# Altium PCB Fri3d_2026_Keeb_00.PcbDoc (part 1 of 2)
Units mm, origin at the board's own origin, x right, y up, seen from the top; angles counter-clockwise.
Board outline 99 x 106 mm, 2 copper layers (Top Layer, Bottom Layer), stack 1.571 mm thick; 46 components, 52 nets, 333 pads, 191 vias.
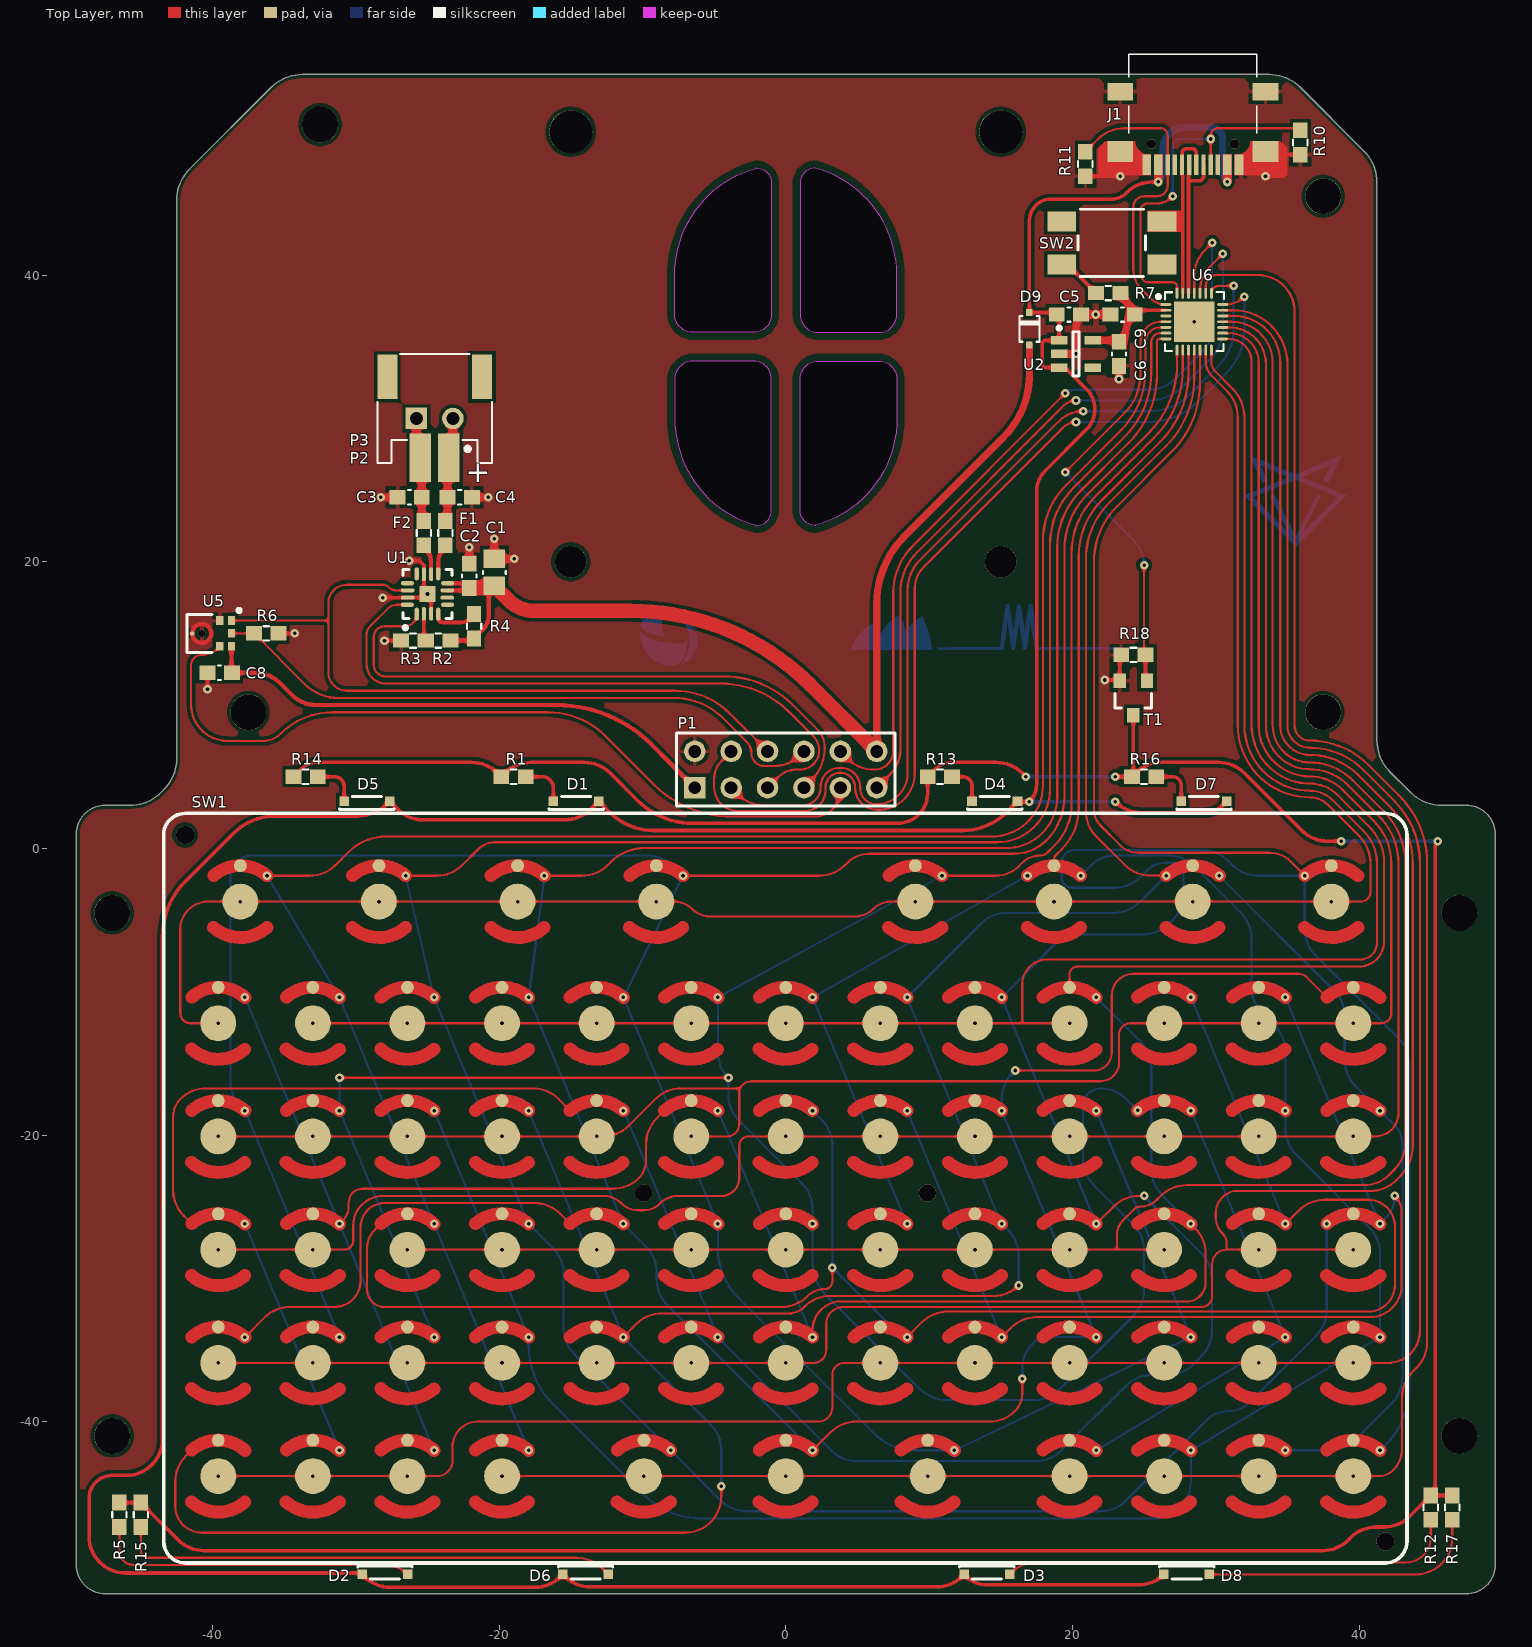
[diagram p0: Top Layer view]
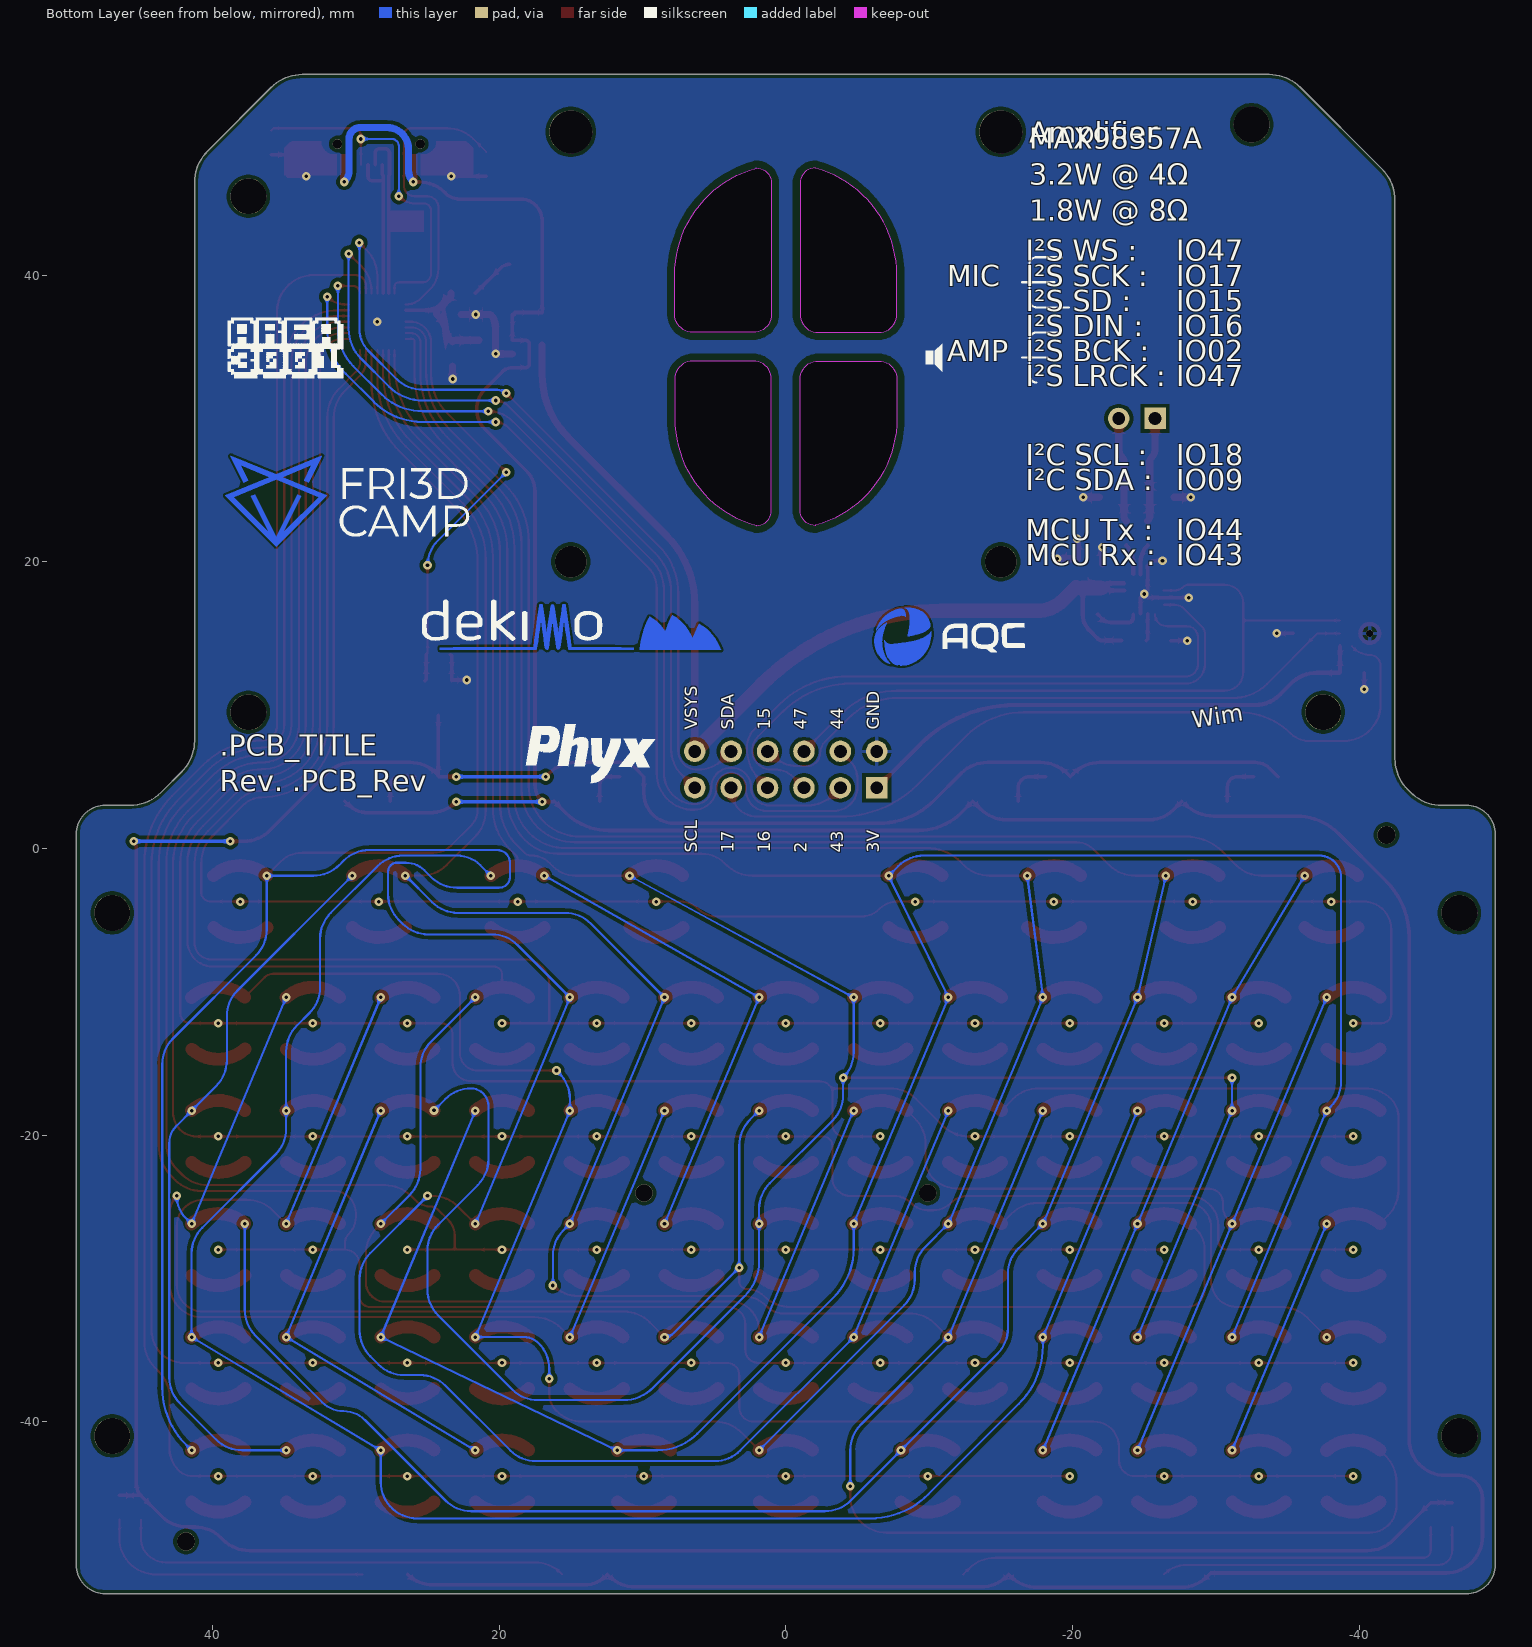
[diagram p1: Bottom Layer view, seen from below]

## Layer stack, top to bottom
Top Solder: solder mask 0.0102, Solder Resist, Dk 3.5
Top Layer: signal copper 0.0356
Dielectric1: core 1.5, FR-4, Dk 4.8
Bottom Layer: signal copper 0.0356
Bottom Solder: solder mask 0.0102, Solder Resist, Dk 3.5

## Board outline
-49.5,-50 ccw(c-47.5,-50) -47.5,-52 47.5,-52 ccw(c47.5,-50) 49.5,-50 49.5,1 ccw(c47.5,1) 47.5,3 45.77,3 cw(c45.77,6.066) 43.602,3.898 43.5,4 42.148,5.352 cw(c44.316,7.52) 41.25,7.52 41.25,7.561 41.25,46.48 ccw(c38.184,46.48) 40.352,48.648 35.898,53.102 ccw(c33.73,50.934) 33.73,54 -33.73,54 ccw(c-33.73,50.934) -35.898,53.102 -41.602,47.398 ccw(c-39.434,45.23) -42.5,45.23 -42.5,6.27 cw(c-45.566,6.27) -43.398,4.102 -43.5,4 -43.602,3.898 cw(c-45.77,6.066) -45.77,3 -47.5,3 ccw(c-47.5,1) -49.5,1
cut-out: 7.75,40 ccw(c0,40) 2.068,47.469 2.071,47.478 ccw(c2.071,46.407) 1,46.407 1,37.27 ccw(c2.27,37.27) 2.27,36 6.48,36 ccw(c6.48,37.27) 7.75,37.27
cut-out: -7.75,40 cw(c0,40) -2.068,47.469 -2.071,47.477 cw(c-2.071,46.407) -1,46.407 -1,37.27 cw(c-2.27,37.27) -2.27,36 -6.48,36 cw(c-6.48,37.27) -7.75,37.27
cut-out: 7.75,30 cw(c0,30) 2.068,22.531 2.071,22.523 cw(c2.071,23.593) 1,23.593 1,32.73 cw(c2.27,32.73) 2.27,34 6.48,34 cw(c6.48,32.73) 7.75,32.73
cut-out: -7.75,30 ccw(c0,30) -2.068,22.531 -2.071,22.523 ccw(c-2.071,23.593) -1,23.593 -1,32.73 ccw(c-2.27,32.73) -2.27,34 -6.48,34 ccw(c-6.48,32.73) -7.75,32.73

## Design rules (kind name [scope] priority, off if disabled: settings)
BoardOutlineClearance [NOT OnLayer('Top Overlay') AND NOT OnLayer('Bottom Overlay') AND NOT IsText AND NOT HasFootprint('MicroBIT_V2_PCB') AND NOT IsKeepOut] p1: gap=0.5 ignorepadtopadclearanceinfootprint=FALSE except(0: Arc-SplitContinuation Track-SplitContinuation SMDPad-SplitContinuation THPad-SplitContinuation Via-SplitContinuation Fill-SplitContinuation Poly-SplitContinuation Region-SplitContinuation Text-SplitContinuation; 0.15: SMDPad-OutlineEdge THPad-OutlineEdge; 0.25: Poly-OutlineEdge Region-OutlineEdge; 0.3: Arc-OutlineEdge Track-OutlineEdge; 0.4: Via-OutlineEdge)
Clearance [All] p1: gap=0.15 ignorepadtopadclearanceinfootprint=FALSE except(0: Arc-Hole Track-Hole SMDPad-Hole THPad-Hole Via-Hole Fill-Hole Region-Hole Text-Hole; 0.25: Arc-Poly Track-Poly SMDPad-Poly THPad-Poly Via-Poly Fill-Poly Poly-Hole; 1.1: Poly-Poly)
ComponentClearance ComponentClearance_TP [HasFootprint('TP_2x3mm')] p1: gap=0 collisioncheckmode=3 verticalgap=0 showdistances=FALSE
ComponentClearance ComponentClearance_CO2 [InComponent('P5') OR InComponent('P8') OR InComponent('MOD2') vs InComponent('P5') OR InComponent('P8') OR InComponent('MOD2')] p2: gap=0 collisioncheckmode=3 verticalgap=0 showdistances=FALSE
ComponentClearance ComponentClearance_BAT [InComponent('P4')  OR InComponent('BAT1') OR InComponent('R27') vs InComponent('P4')  OR InComponent('BAT1') OR InComponent('R27')] p3: gap=0 collisioncheckmode=3 verticalgap=0 showdistances=FALSE
ComponentClearance ComponentClearance_R31-T5 [InComponent('R31') OR InComponent('T5') vs InComponent('R31') OR InComponent('T5')] p4: gap=0 collisioncheckmode=3 verticalgap=0 showdistances=FALSE
ComponentClearance "ComponentClearance_Selection resistors" [InComponent('R45') OR InComponent('R44') OR InComponent('R33') OR InComponent('R34') vs InComponent('R45') OR InComponent('R44') OR InComponent('R33') OR InComponent('R34')] p5: gap=0 collisioncheckmode=3 verticalgap=0 showdistances=FALSE
ComponentClearance ComponentClearance_T9-R4 [InComponent('R4') OR InComponent('T9') vs InComponent('R4') OR InComponent('T9')] p6: gap=0 collisioncheckmode=3 verticalgap=0 showdistances=FALSE
ComponentClearance ComponentClearance_IR [InComponent('D6') OR InComponent('D15') vs InComponent('D6') OR InComponent('D15')] p7: gap=0 collisioncheckmode=3 verticalgap=0 showdistances=FALSE
ComponentClearance [All] p8: gap=0.25 collisioncheckmode=3 verticalgap=0.25 showdistances=FALSE
DiffPairsRouting [All] p1: maxlimit=0.254 minlimit=0.15 mostfreqgap=0.2 toplayer_minwidth=0.25 toplayer_maxwidth=0.5 toplayer_prefwidth=0.25 bottomlayer_minwidth=0.25 bottomlayer_maxwidth=0.5 bottomlayer_prefwidth=0.25 maxuncoupledlength=12.7
HoleSize [All] p1: absolutevalues=TRUE maxlimit=20 minlimit=0.025 maxpercent=80.000 minpercent=20.000
PolygonConnect PolygonConnect_VIA [IsVia] p1: connectstyle=Direct reliefconductorwidth=0.254 reliefentries=4 polygonreliefangle="90 Angle" airgapwidth=0.254
PolygonConnect [All] p2: connectstyle=Relief reliefconductorwidth=0.254 reliefentries=4 polygonreliefangle="90 Angle" airgapwidth=0.254
RoutingVias [All] p1: holewidth=0.3 width=0.7 viastyle="Through Hole" minholewidth=0.3 minwidth=0.2 maxholewidth=0.6 maxwidth=1.2
SilkToSolderMaskClearance SilkscreenOverComponentPads [IsPad] p1: minsilkscreentomaskgap=0.254 clearancetoexposedcopper=TRUE
SolderMaskExpansion [All] p1: expansion=0.05 istentingtop=FALSE
SupplyNets "Schematic Supply Nets" [InNet('+3V3')] p1: voltage=0.000
SupplyNets "Schematic Supply Nets_4" [InNet('VUSB')] p2: voltage=0.000
SupplyNets "Schematic Supply Nets_3" [InNet('VSYS')] p3: voltage=0.000
SupplyNets "Schematic Supply Nets_2" [InNet('GND')] p4: voltage=0.000
SupplyNets "Schematic Supply Nets_1" [InNet('3V3_AUX')] p5: voltage=0.000
Width [All] p1: maxlimit=5 minlimit=0.15 preferedwidth=0.25
26 further rules are at their usual default settings.

## Classes and differential pairs
net class POWER: GND VSYS VUSB
net class 90r: USB.D_n USB.D_p
differential pair USB.D: +USB.D_p -USB.D_n

## Components (designator, comment, footprint, x,y, rotation, side; value= is the part's Value field where it differs from the comment)
C1 "CAP_CERAMIC" C0805_N -20.337,19.263 r90 top value="10uF 10V"
C2 "" C0603_N -22.087,19.013 r90 top value="100nF 16V"
C3 "CAP_CERAMIC" C0603_N -26.25,24.5 r180 top value=220pF
C4 "CAP_CERAMIC" C0603_N -22.75,24.5 r0 top value=220pF
C5 "CAP_CERAMIC" C0603_N 19.75,37.25 r0 top value="1uF 50V"
C6 "CAP_CERAMIC" C0603_N 23.25,34.5 r270 top value="1uF 50V"
C8 "" C0603_N -39.5,12.25 r180 top value="100nF 16V"
C9 "" C0603_N 23.5,37.25 r180 top value="100nF 16V"
D1 "Side emitting Cool White LED 3.0V 30mA 120° 2900mcd" LITE_LTW-010DCG -14.63,3.291 r180 top value=LTW-010DCG-SR-G
D2 "Side emitting Cool White LED 3.0V 30mA 120° 2900mcd" LITE_LTW-010DCG -27.97,-50.659 r0 top value=LTW-010DCG-SR-G
D3 "Side emitting Cool White LED 3.0V 30mA 120° 2900mcd" LITE_LTW-010DCG 14.03,-50.659 r0 top value=LTW-010DCG-SR-G
D4 "Side emitting Cool White LED 3.0V 30mA 120° 2900mcd" LITE_LTW-010DCG 14.58,3.291 r180 top value=LTW-010DCG-SR-G
D5 "Side emitting Cool White LED 3.0V 30mA 120° 2900mcd" LITE_LTW-010DCG -29.23,3.291 r180 top value=LTW-010DCG-SR-G
D6 "Side emitting Cool White LED 3.0V 30mA 120° 2900mcd" LITE_LTW-010DCG -13.97,-50.659 r0 top value=LTW-010DCG-SR-G
D7 "Side emitting Cool White LED 3.0V 30mA 120° 2900mcd" LITE_LTW-010DCG 29.18,3.291 r180 top value=LTW-010DCG-SR-G
D8 "Side emitting Cool White LED 3.0V 30mA 120° 2900mcd" LITE_LTW-010DCG 27.97,-50.659 r0 top value=LTW-010DCG-SR-G
D9 "CUS10S30 Schottky Power Rectifier, 1A, 30V" SOD-323_AC 17,36.25 r90 top value=CUS10S30,H3F
F1 "BLM18KG601SN1D" L0603 -23.75,22 r90 top value="1A3 0R15"
F2 "BLM18KG601SN1D" L0603 -25.25,22 r90 top value="1A3 0R15"
J1 "USB 2.0 C Reversible Receptacle Horizontal full SMD" XUNPU-TYPEC-304S-ACP16 28.4,50.25 r180 top value=TYPEC-304S-ACP16
P1 "Header 6X2" HDR2X6 -6.35,4.23 r0 top locked
P2 "Header 2.0mm Shrouded 2" WE_620102131822 -23.5,27.25 r180 top value=620102131822
P3 "Header 2 RA" HDR1X2_RA -25.77,30 r180 top
R1 "RESISTOR" R0603_N -19,5 r180 top value=100R
R2 "RESISTOR" R0603_N -24.25,14.5 r0 top value=100K
R3 "RESISTOR" R0603_N -26,14.5 r180 top value=100K
R4 "RESISTOR" R0603_N -21.75,15.5 r90 top value=1M
R5 "RESISTOR" R0603_N -46.5,-46.5 r90 top value=100R
R6 "RESISTOR" R0603_N -36.25,15 r0 top value=100K
R7 "RESISTOR" R0603_N 22.5,38.75 r180 top value=100K
R10 "RESISTOR" R0603_N 35.9,49.25 r270 top value=5K1
R11 "RESISTOR" R0603_N 20.9,47.75 r270 top value=5K1
R12 "RESISTOR" R0603_N 45,-46 r90 top value=100R
R13 "RESISTOR" R0603_N 10.75,5 r180 top value=100R
R14 "RESISTOR" R0603_N -33.5,5 r180 top value=100R
R15 "RESISTOR" R0603_N -45,-46.5 r90 top value=100R
R16 "RESISTOR" R0603_N 25,5 r180 top value=100R
R17 "RESISTOR" R0603_N 46.5,-46 r90 top value=100R
R18 "RESISTOR" R0603_N 24.25,13.5 r180 top value=100K
SW1 "Full QWERTY Keyboard Solder Party Dome Sheet" Solder_Party_Keyb -43.409,-48.36 r0 top locked
SW2 "4.5x4.5mm tact SMD H3,8mm" WE_430181038816 22.75,42.25 r180 top value=430181038816
T1 "0.2A N-Ch MOSFET Vgs 1.5" SOT23-3 24.25,10.5 r180 top value=BSS138
U1 "Mono I²S DAC AMP 3W 2.5~5.5V" QFN_16_0.5_3X3 -25,17.75 r90 top value=MAX98357A
U2 "3V3 LDO 300mA 150mV" SOT23-5 20.25,34.5 r0 top value=RT9078-33GJ5
U5 "I2S MIC ICS-43434" TDK_ICS-43434 -40.75,15 r180 top value=ICS-43434
U6 "WCH CH32X035G8U6 QFN28 RISC-V 32-bit MCU, 62KB Flash, 10KB RAM, USB PD" QFN_28_4.0x4.0_P0.4 28.5,36.75 r0 top value=CH32X035G8U6

## Footprints (in the part's own frame and the unit in brackets; to place one, negate y for a bottom-side part, rotate by r counter-clockwise, add the part's x,y. Pads: shape width x height; smd on the part's side, far side on the other; paste and mask are expansions set on the pad)
C0603_N [mm] "Low density"
  rect 1.1x1 smd: 1(-0.85,0) 2(0.85,0)
  silkscreen extent -0.1,-0.5 0.1,0.5, body extent -0.8,-0.4 0.8,0.4, height 0.3
C0805_N [mm] "Low density"
  rect 1.3x1.5 smd: 1(-0.95,0) 2(0.95,0)
  silkscreen extent -0.1,-0.8 0.1,0.8, body extent -1,-0.62 1,0.63, height 0.78
HDR1X2_RA [mm] "Connector; Header; 2 Position, Right Angle"
  rect 1.5x1.5 hole 0.9: 1(0,0)
  round 1.5 hole 0.9: 2(-2.54,0)
  body extent -3.81,-10.06 1.27,0.3, height 2.55
HDR2X6 [mm] "Connector; Header; 6x2 Position"
  rect 1.5x1.5 hole 0.9: 1(0,0)
  round 1.5 hole 0.9: 2(0,2.54) 3(2.54,0) 4(2.54,2.54) 5(5.08,0) 6(5.08,2.54) 7(7.62,0) 8(7.62,2.54) 9(10.16,0) 10(10.16,2.54) 11(12.7,0) 12(12.7,2.54)
  silkscreen extent -1.27,-1.27 13.97,3.81, body extent -1.27,-1.27 13.97,3.81, height 8.5
L0603 [mm] "Low density 0603"
  rect 1.1x1 smd: 1(-0.85,0) 2(0.85,0)
  silkscreen extent -0.2,-0.5 0.2,0.5, body extent -0.8,-0.41 0.8,0.41, height 0.45
LITE_LTW-010DCG [mm] "5050 RGB LED WS2812B WHITE"
  rect 0.67x0.66 smd: 1(-1.585,0) 2(1.585,0)
  silkscreen extent -1.9,-0.32 1.9,0.58, body extent -1.9,-0.33 1.9,0.58, height 0.4
QFN_16_0.5_3X3 [mm] "QFN, 16-Leads, Body 3,00x3,00mm, Pitch 0,50mm, Thermal Pad 1,10x1,10mm, IPC Medium Density"
  oval 0.9x0.3 smd: 1(-1.4,0.75) 4(-1.4,-0.75) 9(1.4,-0.75) 12(1.4,0.75)
  oval 0.95x0.3 smd: 2(-1.375,0.25) 3(-1.375,-0.25) 10(1.375,-0.25) 11(1.375,0.25)
  oval 0.3x0.9 smd: 5(-0.75,-1.4) 8(0.75,-1.4) 13(0.75,1.4) 16(-0.75,1.4)
  oval 0.3x0.95 smd: 6(-0.25,-1.375) 7(0.25,-1.375) 14(0.25,1.375) 15(-0.25,1.375)
  rect 1.1x1.1 smd: 17(0,0)
  silkscreen extent -2.47,-1.7 1.7,1.7, body extent -1.56,-1.56 1.56,1.56, height 0.8
QFN_28_4.0x4.0_P0.4 [mm]
  oval 0.75x0.2 smd: 1(-1.975,1.2) 2(-1.975,0.8) 3(-1.975,0.4) 4(-1.975,0) 5(-1.975,-0.4) 6(-1.975,-0.8) 7(-1.975,-1.2) 15(1.975,-1.2) 16(1.975,-0.8) 17(1.975,-0.4) 18(1.975,0) 19(1.975,0.4) 20(1.975,0.8) 21(1.975,1.2)
  oval 0.2x0.75 smd: 8(-1.2,-1.975) 9(-0.8,-1.975) 10(-0.4,-1.975) 11(0,-1.975) 12(0.4,-1.975) 13(0.8,-1.975) 14(1.2,-1.975) 22(1.2,1.975) 23(0.8,1.975) 24(0.4,1.975) 25(0,1.975) 26(-0.4,1.975) 27(-0.8,1.975) 28(-1.2,1.975)
  rect 2.8x2.8 smd paste-2539.97: 29(0,0)
  silkscreen extent -2.62,-2.05 2.07,2.07, body extent -2.07,-2.07 2.07,2.07, height 0.8
R0603_N [mm] "Low density"
  rect 1.1x1 smd: 1(-0.85,0) 2(0.85,0)
  silkscreen extent -0.2,-0.5 0.2,0.5, body extent -0.8,-0.41 0.8,0.41, height 0.45
SOD-323_AC [mm] "SOD-323"
  rect 0.49x0.45 smd: A(-1.14,0) C(1.14,0)
  silkscreen extent -0.9,-0.7 0.9,0.7, body extent -1.3,-0.68 1.3,0.68, height 1.1
Solder_Party_Keyb [mm]
  round 1.27 hole 1.27 unplated: 0(1.5,49.3) 0(85.25,0)
  round 1.2 hole 1.2: 0(33.5,24.31) 0(53.3,24.31)
  round 0.9 smd paste-2539.97: 1(5.349,47.151) 3(15.024,47.151) 5(24.699,47.151) 7(34.374,47.151) 9(52.449,47.151) 11(62.124,47.151) 13(71.799,47.151) 15(81.474,47.151) 17(3.809,38.661) 19(10.409,38.661) 21(17.009,38.661) 23(23.609,38.661) 25(30.209,38.661) 27(36.809,38.661) 29(43.409,38.661) 31(50.009,38.661) 33(56.609,38.661) 35(63.209,38.661) 37(69.809,38.661) 39(76.409,38.661) 41(83.009,38.661) 43(3.809,30.761) 45(10.409,30.761) 47(17.009,30.761) 49(23.609,30.761) 51(30.209,30.761) 53(36.809,30.761) 55(43.409,30.761) 57(50.009,30.761) 59(56.609,30.761) 61(63.209,30.761) 63(69.809,30.761) 65(76.409,30.761) 67(83.009,30.761) 69(3.809,22.861) 71(10.409,22.861) 73(17.009,22.861) 75(23.609,22.861) 77(30.209,22.861) 79(36.809,22.861) 81(43.409,22.861) 83(50.009,22.861) 85(56.609,22.861) 87(63.209,22.861) 89(69.809,22.861) 91(76.409,22.861) 93(83.009,22.861) 95(3.809,14.961) 97(10.409,14.961) 99(17.009,14.961) 101(23.609,14.961) 103(30.209,14.961) 105(36.809,14.961) 107(43.409,14.961) 109(50.009,14.961) 111(56.609,14.961) 113(63.209,14.961) 115(69.809,14.961) 117(76.409,14.961) 119(83.009,14.961) 121(3.809,7.061) 123(10.409,7.06) 125(17.009,7.06) 127(23.609,7.06) 129(33.509,7.06) 131(43.409,7.06) 133(53.309,7.06) 135(63.209,7.06) 137(69.809,7.06) 139(76.409,7.06) 141(83.009,7.06)
  round 2.5 smd paste-2539.97: 2(5.349,44.65) 4(15.024,44.65) 6(24.699,44.65) 8(34.374,44.65) 10(52.449,44.65) 12(62.124,44.65) 14(71.799,44.65) 16(81.474,44.65) 18(3.809,36.16) 20(10.409,36.16) 22(17.009,36.16) 24(23.609,36.16) 26(30.209,36.16) 28(36.809,36.16) 30(43.409,36.16) 32(50.009,36.16) 34(56.609,36.16) 36(63.209,36.16) 38(69.809,36.16) 40(76.409,36.16) 42(83.009,36.16) 44(3.809,28.26) 46(10.409,28.26) 48(17.009,28.26) 50(23.609,28.26) 52(30.209,28.26) 54(36.809,28.26) 56(43.409,28.26) 58(50.009,28.26) 60(56.609,28.26) 62(63.209,28.26) 64(69.809,28.26) 66(76.409,28.26) 68(83.009,28.26) 70(3.809,20.36) 72(10.409,20.36) 74(17.009,20.36) 76(23.609,20.36) 78(30.209,20.36) 80(36.809,20.36) 82(43.409,20.36) 84(50.009,20.36) 86(56.609,20.36) 88(63.209,20.36) 90(69.809,20.36) 92(76.409,20.36) 94(83.009,20.36) 96(3.809,12.46) 98(10.409,12.46) 100(17.009,12.46) 102(23.609,12.46) 104(30.209,12.46) 106(36.809,12.46) 108(43.409,12.46) 110(50.009,12.46) 112(56.609,12.46) 114(63.209,12.46) 116(69.809,12.46) 118(76.409,12.46) 120(83.009,12.46) 122(3.809,4.56) 124(10.409,4.559) 126(17.009,4.559) 128(23.609,4.559) 130(33.509,4.559) 132(43.409,4.559) 134(53.309,4.559) 136(63.209,4.559) 138(69.809,4.559) 140(76.409,4.559) 142(83.009,4.559)
  Top Layer pour cut-out: 2.925,42.95 2.925,46.275 3.575,46.925 7.175,46.925 7.775,46.325 7.775,42.9 7.5,42.625 3.125,42.625
  Top Layer pour cut-out: 12.6,42.95 12.6,46.275 13.25,46.925 16.85,46.925 17.45,46.325 17.45,42.9 17.175,42.625 12.8,42.625
  Top Layer pour cut-out: 22.275,42.95 22.275,46.275 22.925,46.925 26.525,46.925 27.125,46.325 27.125,42.9 26.85,42.625 22.475,42.625
  Top Layer pour cut-out: 31.95,42.95 31.95,46.275 32.6,46.925 36.2,46.925 36.8,46.325 36.8,42.9 36.525,42.625 32.15,42.625
  Top Layer pour cut-out: 50.025,42.95 50.025,46.275 50.675,46.925 54.275,46.925 54.875,46.325 54.875,42.9 54.6,42.625 50.225,42.625
  Top Layer pour cut-out: 59.7,42.95 59.7,46.275 60.35,46.925 63.95,46.925 64.55,46.325 64.55,42.9 64.275,42.625 59.9,42.625
  Top Layer pour cut-out: 69.375,42.95 69.375,46.275 70.025,46.925 73.625,46.925 74.225,46.325 74.225,42.9 73.95,42.625 69.575,42.625
  Top Layer pour cut-out: 79.05,42.95 79.05,46.275 79.7,46.925 83.3,46.925 83.9,46.325 83.9,42.9 83.625,42.625 79.25,42.625
  Top Layer pour cut-out: 1.385,34.46 1.385,37.785 2.035,38.435 5.635,38.435 6.235,37.835 6.235,34.41 5.96,34.135 1.585,34.135
  Top Layer pour cut-out: 7.985,34.46 7.985,37.785 8.635,38.435 12.235,38.435 12.835,37.835 12.835,34.41 12.56,34.135 8.185,34.135
  Top Layer pour cut-out: 14.585,34.46 14.585,37.785 15.235,38.435 18.835,38.435 19.435,37.835 19.435,34.41 19.16,34.135 14.785,34.135
  Top Layer pour cut-out: 21.185,34.46 21.185,37.785 21.835,38.435 25.435,38.435 26.035,37.835 26.035,34.41 25.76,34.135 21.385,34.135
  Top Layer pour cut-out: 27.785,34.46 27.785,37.785 28.435,38.435 32.035,38.435 32.635,37.835 32.635,34.41 32.36,34.135 27.985,34.135
  Top Layer pour cut-out: 34.385,34.46 34.385,37.785 35.035,38.435 38.635,38.435 39.235,37.835 39.235,34.41 38.96,34.135 34.585,34.135
  Top Layer pour cut-out: 40.985,34.46 40.985,37.785 41.635,38.435 45.235,38.435 45.835,37.835 45.835,34.41 45.56,34.135 41.185,34.135
  Top Layer pour cut-out: 47.585,34.46 47.585,37.785 48.235,38.435 51.835,38.435 52.435,37.835 52.435,34.41 52.16,34.135 47.785,34.135
  Top Layer pour cut-out: 54.185,34.46 54.185,37.785 54.835,38.435 58.435,38.435 59.035,37.835 59.035,34.41 58.76,34.135 54.385,34.135
  Top Layer pour cut-out: 60.785,34.46 60.785,37.785 61.435,38.435 65.035,38.435 65.635,37.835 65.635,34.41 65.36,34.135 60.985,34.135
  Top Layer pour cut-out: 67.385,34.46 67.385,37.785 68.035,38.435 71.635,38.435 72.235,37.835 72.235,34.41 71.96,34.135 67.585,34.135
  Top Layer pour cut-out: 73.985,34.46 73.985,37.785 74.635,38.435 78.235,38.435 78.835,37.835 78.835,34.41 78.56,34.135 74.185,34.135
  Top Layer pour cut-out: 80.585,34.46 80.585,37.785 81.235,38.435 84.835,38.435 85.435,37.835 85.435,34.41 85.16,34.135 80.785,34.135
  Top Layer pour cut-out: 1.385,26.56 1.385,29.885 2.035,30.535 5.635,30.535 6.235,29.935 6.235,26.51 5.96,26.235 1.585,26.235
  Top Layer pour cut-out: 7.985,26.56 7.985,29.885 8.635,30.535 12.235,30.535 12.835,29.935 12.835,26.51 12.56,26.235 8.185,26.235
  Top Layer pour cut-out: 14.585,26.56 14.585,29.885 15.235,30.535 18.835,30.535 19.435,29.935 19.435,26.51 19.16,26.235 14.785,26.235
  Top Layer pour cut-out: 21.185,26.56 21.185,29.885 21.835,30.535 25.435,30.535 26.035,29.935 26.035,26.51 25.76,26.235 21.385,26.235
  Top Layer pour cut-out: 27.785,26.56 27.785,29.885 28.435,30.535 32.035,30.535 32.635,29.935 32.635,26.51 32.36,26.235 27.985,26.235
  Top Layer pour cut-out: 34.385,26.56 34.385,29.885 35.035,30.535 38.635,30.535 39.235,29.935 39.235,26.51 38.96,26.235 34.585,26.235
  Top Layer pour cut-out: 40.985,26.56 40.985,29.885 41.635,30.535 45.235,30.535 45.835,29.935 45.835,26.51 45.56,26.235 41.185,26.235
  Top Layer pour cut-out: 47.585,26.56 47.585,29.885 48.235,30.535 51.835,30.535 52.435,29.935 52.435,26.51 52.16,26.235 47.785,26.235
  Top Layer pour cut-out: 54.185,26.56 54.185,29.885 54.835,30.535 58.435,30.535 59.035,29.935 59.035,26.51 58.76,26.235 54.385,26.235
  Top Layer pour cut-out: 60.785,26.56 60.785,29.885 61.435,30.535 65.035,30.535 65.635,29.935 65.635,26.51 65.36,26.235 60.985,26.235
  Top Layer pour cut-out: 67.385,26.56 67.385,29.885 68.035,30.535 71.635,30.535 72.235,29.935 72.235,26.51 71.96,26.235 67.585,26.235
  Top Layer pour cut-out: 73.985,26.56 73.985,29.885 74.635,30.535 78.235,30.535 78.835,29.935 78.835,26.51 78.56,26.235 74.185,26.235
  Top Layer pour cut-out: 80.585,26.56 80.585,29.885 81.235,30.535 84.835,30.535 85.435,29.935 85.435,26.51 85.16,26.235 80.785,26.235
  Top Layer pour cut-out: 1.385,18.66 1.385,21.985 2.035,22.635 5.635,22.635 6.235,22.035 6.235,18.61 5.96,18.335 1.585,18.335
  Top Layer pour cut-out: 7.985,18.66 7.985,21.985 8.635,22.635 12.235,22.635 12.835,22.035 12.835,18.61 12.56,18.335 8.185,18.335
  Top Layer pour cut-out: 14.585,18.66 14.585,21.985 15.235,22.635 18.835,22.635 19.435,22.035 19.435,18.61 19.16,18.335 14.785,18.335
  Top Layer pour cut-out: 21.185,18.66 21.185,21.985 21.835,22.635 25.435,22.635 26.035,22.035 26.035,18.61 25.76,18.335 21.385,18.335
  Top Layer pour cut-out: 27.785,18.66 27.785,21.985 28.435,22.635 32.035,22.635 32.635,22.035 32.635,18.61 32.36,18.335 27.985,18.335
  Top Layer pour cut-out: 34.385,18.66 34.385,21.985 35.035,22.635 38.635,22.635 39.235,22.035 39.235,18.61 38.96,18.335 34.585,18.335
  Top Layer pour cut-out: 40.985,18.66 40.985,21.985 41.635,22.635 45.235,22.635 45.835,22.035 45.835,18.61 45.56,18.335 41.185,18.335
  Top Layer pour cut-out: 47.585,18.66 47.585,21.985 48.235,22.635 51.835,22.635 52.435,22.035 52.435,18.61 52.16,18.335 47.785,18.335
  Top Layer pour cut-out: 54.185,18.66 54.185,21.985 54.835,22.635 58.435,22.635 59.035,22.035 59.035,18.61 58.76,18.335 54.385,18.335
  Top Layer pour cut-out: 60.785,18.66 60.785,21.985 61.435,22.635 65.035,22.635 65.635,22.035 65.635,18.61 65.36,18.335 60.985,18.335
  Top Layer pour cut-out: 67.385,18.66 67.385,21.985 68.035,22.635 71.635,22.635 72.235,22.035 72.235,18.61 71.96,18.335 67.585,18.335
  Top Layer pour cut-out: 73.985,18.66 73.985,21.985 74.635,22.635 78.235,22.635 78.835,22.035 78.835,18.61 78.56,18.335 74.185,18.335
  Top Layer pour cut-out: 80.585,18.66 80.585,21.985 81.235,22.635 84.835,22.635 85.435,22.035 85.435,18.61 85.16,18.335 80.785,18.335
  Top Layer pour cut-out: 1.385,10.76 1.385,14.085 2.035,14.735 5.635,14.735 6.235,14.135 6.235,10.71 5.96,10.435 1.585,10.435
  Top Layer pour cut-out: 7.985,10.76 7.985,14.085 8.635,14.735 12.235,14.735 12.835,14.135 12.835,10.71 12.56,10.435 8.185,10.435
  Top Layer pour cut-out: 14.585,10.76 14.585,14.085 15.235,14.735 18.835,14.735 19.435,14.135 19.435,10.71 19.16,10.435 14.785,10.435
  Top Layer pour cut-out: 21.185,10.76 21.185,14.085 21.835,14.735 25.435,14.735 26.035,14.135 26.035,10.71 25.76,10.435 21.385,10.435
  Top Layer pour cut-out: 27.785,10.76 27.785,14.085 28.435,14.735 32.035,14.735 32.635,14.135 32.635,10.71 32.36,10.435 27.985,10.435
  Top Layer pour cut-out: 34.385,10.76 34.385,14.085 35.035,14.735 38.635,14.735 39.235,14.135 39.235,10.71 38.96,10.435 34.585,10.435
  Top Layer pour cut-out: 40.985,10.76 40.985,14.085 41.635,14.735 45.235,14.735 45.835,14.135 45.835,10.71 45.56,10.435 41.185,10.435
  Top Layer pour cut-out: 47.585,10.76 47.585,14.085 48.235,14.735 51.835,14.735 52.435,14.135 52.435,10.71 52.16,10.435 47.785,10.435
  Top Layer pour cut-out: 54.185,10.76 54.185,14.085 54.835,14.735 58.435,14.735 59.035,14.135 59.035,10.71 58.76,10.435 54.385,10.435
  Top Layer pour cut-out: 60.785,10.76 60.785,14.085 61.435,14.735 65.035,14.735 65.635,14.135 65.635,10.71 65.36,10.435 60.985,10.435
  Top Layer pour cut-out: 67.385,10.76 67.385,14.085 68.035,14.735 71.635,14.735 72.235,14.135 72.235,10.71 71.96,10.435 67.585,10.435
  Top Layer pour cut-out: 73.985,10.76 73.985,14.085 74.635,14.735 78.235,14.735 78.835,14.135 78.835,10.71 78.56,10.435 74.185,10.435
  Top Layer pour cut-out: 80.585,10.76 80.585,14.085 81.235,14.735 84.835,14.735 85.435,14.135 85.435,10.71 85.16,10.435 80.785,10.435
  Top Layer pour cut-out: 1.385,2.86 1.385,6.185 2.035,6.835 5.635,6.835 6.235,6.235 6.235,2.81 5.96,2.535 1.585,2.535
  Top Layer pour cut-out: 7.985,2.86 7.985,6.185 8.635,6.835 12.235,6.835 12.835,6.235 12.835,2.81 12.56,2.535 8.185,2.535
  Top Layer pour cut-out: 14.585,2.86 14.585,6.185 15.235,6.835 18.835,6.835 19.435,6.235 19.435,2.81 19.16,2.535 14.785,2.535
  Top Layer pour cut-out: 21.185,2.86 21.185,6.185 21.835,6.835 25.435,6.835 26.035,6.235 26.035,2.81 25.76,2.535 21.385,2.535
  Top Layer pour cut-out: 40.985,2.86 40.985,6.185 41.635,6.835 45.235,6.835 45.835,6.235 45.835,2.81 45.56,2.535 41.185,2.535
  Top Layer pour cut-out: 60.785,2.86 60.785,6.185 61.435,6.835 65.035,6.835 65.635,6.235 65.635,2.81 65.36,2.535 60.985,2.535
  Top Layer pour cut-out: 67.385,2.86 67.385,6.185 68.035,6.835 71.635,6.835 72.235,6.235 72.235,2.81 71.96,2.535 67.585,2.535
  Top Layer pour cut-out: 73.985,2.86 73.985,6.185 74.635,6.835 78.235,6.835 78.835,6.235 78.835,2.81 78.56,2.535 74.185,2.535
  Top Layer pour cut-out: 80.585,2.86 80.585,6.185 81.235,6.835 84.835,6.835 85.435,6.235 85.435,2.81 85.16,2.535 80.785,2.535
  Top Layer pour cut-out: 50.885,2.86 50.885,6.185 51.535,6.835 55.135,6.835 55.735,6.235 55.735,2.81 55.46,2.535 51.085,2.535
  Top Layer pour cut-out: 40.985,2.86 40.985,6.185 41.635,6.835 45.235,6.835 45.835,6.235 45.835,2.81 45.56,2.535 41.185,2.535
  Top Layer pour cut-out: 31.085,2.86 31.085,6.185 31.735,6.835 35.335,6.835 35.935,6.235 35.935,2.81 35.66,2.535 31.285,2.535
  Top Layer lines w0.9: 1.944,2.76 ccw(c3.809,4.853) 5.657,2.746 ; 1.944,10.66 ccw(c3.809,12.753) 5.657,10.646 ; 1.944,18.56 ccw(c3.809,20.653) 5.657,18.546 ; 1.944,26.46 ccw(c3.809,28.553) 5.657,26.446 ; 1.944,34.36 ccw(c3.809,36.453) 5.657,34.346 ; 1.958,6.374 cw(c3.806,4.267) 5.671,6.36 ; 1.958,14.274 cw(c3.806,12.167) 5.671,14.26 ; 1.958,22.174 cw(c3.806,20.067) 5.671,22.16 ; 1.958,30.074 cw(c3.806,27.967) 5.671,30.06 ; 1.958,37.974 cw(c3.806,35.867) 5.671,37.96 ; 3.484,42.85 ccw(c5.349,44.943) 7.197,42.836 ; 3.498,46.464 cw(c5.346,44.357) 7.211,46.45 ; 8.544,2.759 ccw(c10.409,4.852) 12.257,2.745 ; 8.544,10.66 ccw(c10.409,12.753) 12.257,10.646 ; 8.544,18.56 ccw(c10.409,20.653) 12.257,18.546 ; 8.544,26.46 ccw(c10.409,28.553) 12.257,26.446 ; 8.544,34.36 ccw(c10.409,36.453) 12.257,34.346 ; 8.558,6.373 cw(c10.406,4.266) 10.409,7.069 cw(c10.406,4.266) 12.271,6.359 ; 8.557,14.274 cw(c10.406,12.167) 10.409,14.97 cw(c10.406,12.167) 12.271,14.26 ; 8.557,22.174 cw(c10.406,20.067) 10.409,22.87 cw(c10.406,20.067) 12.271,22.16 ; 8.557,30.074 cw(c10.406,27.967) 10.409,30.77 cw(c10.406,27.967) 12.271,30.06 ; 8.557,37.974 cw(c10.406,35.867) 10.409,38.67 cw(c10.406,35.867) 12.271,37.96 ; 13.159,42.85 ccw(c15.024,44.943) 16.872,42.836 ; 13.173,46.464 cw(c15.021,44.357) 16.886,46.45 ; 15.144,2.759 ccw(c17.009,4.852) 18.857,2.745 ; 15.144,10.66 ccw(c17.009,12.753) 18.857,10.646 ; 15.144,18.56 ccw(c17.009,20.653) 18.857,18.546 ; 15.144,26.46 ccw(c17.009,28.553) 18.857,26.446 ; 15.144,34.36 ccw(c17.009,36.453) 18.857,34.346 ; 15.158,6.373 cw(c17.006,4.266) 18.871,6.359 ; 15.157,14.274 cw(c17.006,12.167) 18.871,14.26 ; 15.157,22.174 cw(c17.006,20.067) 18.871,22.16 ; 15.157,30.074 cw(c17.006,27.967) 18.871,30.06 ; 15.157,37.974 cw(c17.006,35.867) 18.871,37.96 ; 21.744,2.759 ccw(c23.609,4.852) 25.457,2.745 ; 21.744,10.66 ccw(c23.609,12.753) 25.457,10.646 ; 21.744,18.56 ccw(c23.609,20.653) 25.457,18.546 ; 21.744,26.46 ccw(c23.609,28.553) 25.457,26.446 ; 21.744,34.36 ccw(c23.609,36.453) 25.457,34.346 ; 21.758,6.373 cw(c23.606,4.266) 25.471,6.359 ; 21.758,14.274 cw(c23.606,12.167) 25.471,14.26 ; 21.758,22.174 cw(c23.606,20.067) 25.471,22.16 ; 21.758,30.074 cw(c23.606,27.967) 25.471,30.06 ; 21.758,37.974 cw(c23.606,35.867) 25.471,37.96 ; 22.834,42.85 ccw(c24.699,44.943) 26.547,42.836 ; 22.848,46.464 cw(c24.696,44.357) 26.561,46.45 ; 28.344,10.66 ccw(c30.209,12.753) 32.057,10.646 ; 28.344,18.56 ccw(c30.209,20.653) 32.057,18.546 ; 28.344,26.46 ccw(c30.209,28.553) 32.057,26.446 ; 28.344,34.36 ccw(c30.209,36.453) 32.057,34.346 ; 28.358,14.274 cw(c30.206,12.167) 32.071,14.26 ; 28.358,22.174 cw(c30.206,20.067) 32.071,22.16 ; 28.358,30.074 cw(c30.206,27.967) 32.071,30.06 ; 28.358,37.974 cw(c30.206,35.867) 32.071,37.96 ; 31.644,2.759 ccw(c33.509,4.852) 35.357,2.745 ; 31.658,6.373 cw(c33.506,4.266) 35.371,6.359 ; 32.509,42.85 ccw(c34.374,44.943) 36.222,42.836 ; 32.523,46.464 cw(c34.371,44.357) 36.236,46.45 ; 34.944,10.66 ccw(c36.809,12.753) 38.657,10.646 ; 34.944,18.56 ccw(c36.809,20.653) 38.657,18.546 ; 34.944,26.46 ccw(c36.809,28.553) 38.657,26.446 ; 34.944,34.36 ccw(c36.809,36.453) 38.657,34.346 ; 34.958,14.274 cw(c36.806,12.167) 38.671,14.26 ; 34.958,22.174 cw(c36.806,20.067) 38.671,22.16 ; 34.958,30.074 cw(c36.806,27.967) 38.671,30.06 ; 34.958,37.974 cw(c36.806,35.867) 38.671,37.96 ; 41.544,2.759 ccw(c43.409,4.852) 45.257,2.745 ; 41.544,10.66 ccw(c43.409,12.753) 45.257,10.646 ; 41.544,18.56 ccw(c43.409,20.653) 45.257,18.546 ; 41.544,26.46 ccw(c43.409,28.553) 45.257,26.446 ; 41.544,34.36 ccw(c43.409,36.453) 45.257,34.346 ; 41.558,6.373 cw(c43.406,4.266) 45.271,6.359 ; 41.557,14.274 cw(c43.406,12.167) 45.271,14.26 ; 41.557,22.174 cw(c43.406,20.067) 45.271,22.16 ; 41.557,30.074 cw(c43.406,27.967) 45.271,30.06 ; 41.557,37.974 cw(c43.406,35.867) 45.271,37.96 ; 48.144,10.66 ccw(c50.009,12.753) 51.857,10.646 ; 48.144,18.56 ccw(c50.009,20.653) 51.857,18.546 ; 48.144,26.46 ccw(c50.009,28.553) 51.857,26.446 ; 48.144,34.36 ccw(c50.009,36.453) 51.857,34.346 ; 48.158,14.274 cw(c50.006,12.167) 51.871,14.26 ; 48.158,22.174 cw(c50.006,20.067) 51.871,22.16 ; 48.158,30.074 cw(c50.006,27.967) 51.871,30.06 ; 48.158,37.974 cw(c50.006,35.867) 50.009,38.67 cw(c50.006,35.867) 51.871,37.96 ; 50.584,42.85 ccw(c52.449,44.943) 54.297,42.836 ; 50.598,46.464 cw(c52.446,44.357) 54.311,46.45 ; 51.444,2.759 ccw(c53.309,4.852) 55.157,2.745 ; 51.458,6.373 cw(c53.306,4.266) 55.171,6.359 ; 54.744,10.66 ccw(c56.609,12.753) 58.457,10.646 ; 54.744,18.56 ccw(c56.609,20.653) 58.457,18.546 ; 54.744,26.46 ccw(c56.609,28.553) 58.457,26.446 ; 54.744,34.36 ccw(c56.609,36.453) 58.457,34.346 ; 54.758,14.274 cw(c56.606,12.167) 58.471,14.26 ; 54.758,22.174 cw(c56.606,20.067) 58.471,22.16 ; 54.758,30.074 cw(c56.606,27.967) 58.471,30.06 ; 54.758,37.974 cw(c56.606,35.867) 58.471,37.96 ; 60.259,42.85 ccw(c62.124,44.943) 63.973,42.836 ; 60.273,46.464 cw(c62.121,44.357) 62.124,47.16 cw(c62.121,44.357) 63.986,46.45 ; 61.344,2.759 ccw(c63.209,4.852) 65.057,2.745 ; 61.344,10.66 ccw(c63.209,12.753) 65.057,10.646 ; 61.344,18.56 ccw(c63.209,20.653) 65.057,18.546 ; 61.344,26.46 ccw(c63.209,28.553) 65.057,26.446 ; 61.344,34.36 ccw(c63.209,36.453) 65.057,34.346 ; 61.358,6.373 cw(c63.206,4.266) 65.071,6.359 ; 61.358,14.274 cw(c63.206,12.167) 65.071,14.26 ; 61.358,22.174 cw(c63.206,20.067) 65.071,22.16 ; 61.358,30.074 cw(c63.206,27.967) 65.071,30.06 ; 61.358,37.974 cw(c63.206,35.867) 63.209,38.67 cw(c63.206,35.867) 65.071,37.96 ; 67.944,2.759 ccw(c69.809,4.852) 71.657,2.745 ; 67.944,10.66 ccw(c69.809,12.753) 71.657,10.646 ; 67.944,18.56 ccw(c69.809,20.653) 71.657,18.546 ; 67.944,26.46 ccw(c69.809,28.553) 71.657,26.446 ; 67.944,34.36 ccw(c69.809,36.453) 71.657,34.346 ; 67.958,6.373 cw(c69.806,4.266) 71.671,6.359 ; 67.958,14.274 cw(c69.806,12.167) 71.671,14.26 ; 67.958,22.174 cw(c69.806,20.067) 71.671,22.16 ; 67.958,30.074 cw(c69.806,27.967) 71.671,30.06 ; 67.958,37.974 cw(c69.806,35.867) 71.671,37.96 ; 69.934,42.85 ccw(c71.799,44.943) 73.647,42.836 ; 69.948,46.464 cw(c71.796,44.357) 71.799,47.16 cw(c71.796,44.357) 73.661,46.45 ; 74.544,2.759 ccw(c76.409,4.852) 78.257,2.745 ; 74.544,10.66 ccw(c76.409,12.753) 78.257,10.646 ; 74.544,18.56 ccw(c76.409,20.653) 78.257,18.546 ; 74.544,26.46 ccw(c76.409,28.553) 78.257,26.446 ; 74.544,34.36 ccw(c76.409,36.453) 78.257,34.346 ; 74.558,6.373 cw(c76.406,4.266) 78.271,6.359 ; 74.558,14.274 cw(c76.406,12.167) 78.271,14.26 ; 74.558,22.174 cw(c76.406,20.067) 78.271,22.16 ; 74.558,30.074 cw(c76.406,27.967) 78.271,30.06 ; 74.558,37.974 cw(c76.406,35.867) 78.271,37.96 ; 79.609,42.85 ccw(c81.474,44.943) 83.322,42.836 ; 79.623,46.464 cw(c81.471,44.357) 81.465,47.16 cw(c81.471,44.357) 83.336,46.45 ; 81.144,2.759 ccw(c83.009,4.852) 84.857,2.745 ; 81.144,10.66 ccw(c83.009,12.753) 84.857,10.646 ; 81.144,18.56 ccw(c83.009,20.653) 84.857,18.546 ; 81.144,26.46 ccw(c83.009,28.553) 84.857,26.446 ; 81.144,34.36 ccw(c83.009,36.453) 84.857,34.346 ; 81.158,6.373 cw(c83.006,4.266) 84.871,6.359 ; 81.158,14.274 cw(c83.006,12.167) 84.871,14.26 ; 81.158,22.174 cw(c83.006,20.067) 84.871,22.16 ; 81.158,30.074 cw(c83.006,27.967) 84.871,30.06 ; 81.158,37.974 cw(c83.006,35.867) 84.871,37.96
  silkscreen extent 0,-1.5 86.76,50.8, body extent 0,-1.5 86.75,50.8, height 4.95
SOT23-3 [mm] "SOT-23; 3 Leads; Body 3.1 x 2.5 mm, inc. leads (LxW max)"
  rect 0.85x1 smd: 1(-0.95,-1.2) 2(0.95,-1.2) 3(0,1.2)
  silkscreen extent -1.27,-0.3 1.28,0.7, body extent -1.5,-1.32 1.5,1.32, height 1.08
SOT23-5 [mm] "SOT23, 5-Leads, Body 3,1x3,2mm (max), Pitch 0,95mm, IPC Medium Density"
  rect 1.15x0.6 smd: 1(-1.175,0.95) 2(-1.175,0) 3(-1.175,-0.95) 4(1.175,-0.95) 5(1.175,0.95)
  silkscreen extent -1.3,-1.55 0.2,1.92, body extent -1.4,-1.45 1.4,1.45, height 1.45
TDK_ICS-43434 [mm]
  rect 0.522x0.6 smd: 1(-2.074,-0.9) 2(-1.252,-0.9) 4(-1.252,0.9) 5(-2.074,0.9) 6(-2.074,0)
  round 0.5 hole 0.5 unplated: 3(0,0)
  round 0.3 smd: 3(0.663,0)
  Top Layer circle w0.3: c0,0 r0.663
  silkscreen extent -2.73,-1.72 1.04,1.33, body extent -2.46,-1.33 1.04,1.33, height 0.98
WE_430181038816 [mm] "Miniature SMD TACT SW"
  rect 2x1.4 smd: 1(-3.5,1.5) 1(3.5,1.5) 2(-3.5,-1.5) 2(3.5,-1.5)
  silkscreen extent -2.35,-2.35 2.35,2.35, body extent -3.75,-2.25 3.75,2.25, height 3.8
WE_620102131822 [mm]
  rect 1.5x3.4 smd: 1(0,0) 2(2,0)
  rect 1.4x3.1 smd: M1(-2.3,-5.65) M2(4.3,-5.65)
  silkscreen extent -3,-7.24 5,0.37, body extent -3,-7.24 5,1.36, height 5.65
XUNPU-TYPEC-304S-ACP16 [mm] "USB C Connector SMD"
  round 0.65 hole 0.65 unplated: 0(-2.89,1.102) 0(2.89,1.102)
  rect 0.3x1.45 smd: A1(-3.375,2.548) A4(-2.55,2.548) A5(-1.25,2.547) A6(-0.25,2.548) A7(0.25,2.548) A8(1.25,2.547) A9(2.55,2.548) A12(3.375,2.548) B1(3.075,2.548) B4(2.25,2.548) B5(1.75,2.548) B6(0.75,2.548) B7(-0.75,2.548) B8(-1.75,2.547) B9(-2.25,2.548) B12(-3.075,2.548)
  rect 1.8x1.45 smd: MH1(-5.07,1.632) MH4(5.07,1.632)
  rect 1.8x1.2 smd: MH2(-5.07,-2.548) MH3(5.07,-2.548)
  silkscreen extent -4.47,-5.15 4.47,0.35, body extent -4.5,-5.15 4.44,2.75, height 3.26

## Part data
C1: library part "CAP # 10uF 10V 0805", "Capacitor Ceramic", Supplier Part Number 1=2320859, Supplier 1=Farnell
C2 C8 C9: library part "CAP # 100nF 16V 0603", "Capacitor Ceramic"
C3 C4: library part "CAP # 220pF 50V 0603", "Capacitor Ceramic", Supplier Part Number 1=C5254623, Supplier 1=LCSC, Supplier 2=LCSC, Supplier 3=Generic, Supplier Part Number 2=C107081, Supplier Part Number 3="220pF 0603"
C5 C6: library part "CAP # 1uF 50V 0603", "Capacitor Ceramic", Supplier Part Number 1=2112858, Supplier 1=Farnell, Supplier 3=Generic, Supplier Part Number 3="1uF 50V 0603 X7R"
D1 D2 D3 D4 D5 D6 D7 D8: library part "LED # White Side Emitting LTW-010DCG-SR-G", "=Description", Supplier Part Number 1=C5175311, Supplier 1=LCSC, Supplier 2=LCSC, Supplier 3=LCSC, Supplier Part Number 2=C5175309, Supplier Part Number 3=C5175310
D9: library part "Schottky # CUS10S30", "=Description", Supplier Part Number 1=C146335, Supplier 1=LCSC
F1 F2: library part "FER # 600R 1A3 0603 0R15 BLM18KG601SN1D", Supplier Part Number 1=1781094, Supplier 1=Farnell
J1: library part "USB # C 2.0 RCPT TYPEC-304S-ACP16", Supplier Part Number 1=C720630, Supplier 1=LCSC
P1: library part "Pin Header 2.54mm dual row 12way"
P2: library part "HDR # SHR 2.0mm 2way - 620102131822", Supplier Part Number 1=620102131822, Supplier 1=Wurth, Supplier 2=Mouser, Supplier Part Number 2=710-620102131822
P3: library part "Pin Header 2.54mm 2way RA"
R1 R5 R12 R13 R14 R15 R16 R17: library part "RES # 100R 0603", Supplier Part Number 1=2446544, Supplier 1=Farnell, Supplier 2=LCSC, Supplier 3=Generic, Supplier Part Number 2=C22775, Supplier Part Number 3="100R 1% 0603"
R2 R3 R6 R7 R18: library part "RES # 100K 0603", Supplier 3=Generic, Supplier Part Number 3="100K 1% 0603"
R4: library part "RES # 1M 0603", Supplier 3=Generic, Supplier Part Number 3="1M 1% 0603"
R10 R11: library part "RES # 5K1 0603", Supplier Part Number 1=2845922, Supplier 1=Farnell
SW1: library part Solder_Party_Keyb
SW2: library part "SW # TACT small 4.5x4.5mm SMD WS-TASV", Supplier Part Number 1=430181038816, Supplier 1=Wurth, Supplier 2=Mouser, Supplier 3=LCSC, Supplier Part Number 2=710-430181038816, Supplier Part Number 3=C174049
T1: library part "BSS138 N-Ch MOSFET 0.2A 1.5Vgs 60Vds", Supplier Part Number 1=2432717, Supplier 1=Farnell, Supplier 2=LCSC, Supplier 3=LCSC, Supplier Part Number 2=C426569, Supplier Part Number 3="C5224260 / C5224267"
U1: library part "AMP # AUD MAX98357A", "=Description", Supplier Part Number 1=2949165, Supplier 1=Farnell
U2: library part "LDO # 3V3 300mA RT9078-33GJ5", "=Designator", Supplier Part Number 1=C110427, Supplier 1=LCSC
U5: library part "MIC # MEMS I2S ICS-43434", "=Description", Supplier Part Number 1=410-ICS-43434, Supplier 1=Mouser, Supplier 2=Farnell, Supplier Part Number 2=2911502
U6: library part "RISCV # CH32X035G8U6", Supplier Part Number 1=C7437027, Supplier 1=LCSC

## Free pads (board coordinates)
  round 2.5 hole 2.5 unplated: 0(-47,-41) 0(-47,-4.5) 0(47,-41) 0(47,-4.5)
  round 2.5 hole 2.5 unplated mask+0.2: 0(-37.5,9.5) 0(-32.5,50.5) 0(37.5,9.5) 0(37.5,45.5)
  round 2.2 hole 2.2 unplated: 0(-15,20) 0(15,20)
  round 3 hole 3 unplated: 0(-15,50) 0(15,50)

## Via types
v1: diameter 0.6, hole 0.25, Top Layer to Bottom Layer, 191 vias

## Nets (pads, with @x,y where several pads share a name; then routed paths per layer and width w, separated by ;. In a path a pad name is that pad's centre, name@x,y a point inside that pad or via, vN(x,y) a via of type N, cw(c..) or ccw(c..) an arc to the next point about the centre after c; other vN are vias at no path point)
3V3_AUX: C8.1 P1.1 U5.5 | length 36.9
  Top Layer w0.3: U5.5@-38.676,14.1 -38.676,12.313 ccw(c-38.587,12.313) C8.1@-38.65,12.25 -37.052,12.25 cw(c-37.052,9.71) -35.256,11.506 -34.457,10.707 ccw(c-32.75,12.414) -32.75,10 -16.001,10 cw(c-16.001,0.632) -9.376,7.256 -8.1,5.98 P1.1@-6.35,4.23
+3V3: C6.1 C9.1 R7.1 U2.5 U6.2 | length 8.5
  Top Layer w0.25: C9.1@24.35,37.55 U6.2@26.525,37.55
  Top Layer w0.5: U2.5@21.425,35.45 23.009,35.45 cw(c23.009,35.109) C6.1@23.25,35.35 23.467,35.567 ccw(c22.785,36.25) 23.75,36.25 cw(c24.716,36.25) 24.033,36.933 C9.1@24.35,37.25 ; R7.1@23.35,38.75 23.35,38.525 24.35,37.525 C9.1@24.35,37.25 ; C9.1@24.35,37.55 C9.1@24.35,37.25
BL: R18.1 T1.1 U6.4 | length 30.5
  Top Layer w0.15: v1(19.5,26.25) 23.652,30.402 ccw(c21.003,33.052) 24.75,33.052 24.75,35.311 cw(c26.189,35.311) 26.189,36.75 U6.4@26.525,36.75 ; v1(25,19.75) 25,13.741 ccw(c25.341,13.741) R18.1@25.1,13.5
  Top Layer w0.25: R18.1@25.1,13.5 25.1,11.8 ccw(c25.2,11.8) T1.1@25.2,11.7
  Bottom Layer w0.15: v1(19.5,26.25) 24.293,21.457 cw(c22.586,19.75) v1(25,19.75)
CC1: J1.A5 R10.1 U6.28 | length 25.7
  Top Layer w0.15: v1(27,45.5) 26.942,45.442 cw(c25.875,46.509) 25.875,45 25.25,45 ccw(c25.25,44.5) 24.75,44.5 24.75,40.083 ccw(c25.333,40.083) 25.333,39.5 27,39.5 cw(c27,39.2) 27.3,39.2 U6.28@27.3,38.725 ; J1.A5@29.65,47.703 v1(29.65,49.5) 29.65,49.75 cw(c30.15,49.75) 30.15,50.25 33.198,50.25 34.24,50.25 35.75,50.25 R10.1@35.9,50.1
  Bottom Layer w0.15: v1(27,45.5) 27,49 cw(c27.5,49) 27.5,49.5 v1(29.65,49.5)
CC2: J1.B5 R11.1 U6.1 | length 21.3
  Top Layer w0.15: R11.1@20.9,48.6 21.806,49.506 cw(c23.602,47.71) 23.602,50.25 26.15,50.25 cw(c26.15,49.75) 26.65,49.75 J1.B5@26.65,47.703 26.65,46.254 cw(c25.896,46.254) 25.896,45.5 25,45.5 ccw(c25,44.744) 24.244,44.744 24.244,40.427 ccw(c26.266,40.427) 24.836,38.996 25.429,38.404 ccw(c26.525,39.5) U6.1@26.525,37.95
COL0: SW1.1 SW1.19 SW1.37 SW1.55 SW1.73 SW1.91 SW1.109 SW1.127 U6.5 | length 261.1
  Top Layer w0.15: v1(-36.198,-1.91) -33.212,-1.91 ccw(c-33.212,0.63) -31.416,-1.166 -30.494,-0.244 cw(c-27.919,-2.819) -27.919,0.823 14.368,0.823 ccw(c14.368,4.394) 17.94,4.382 17.94,21.428 cw(c23.484,21.428) 19.564,25.349 23.369,29.154 ccw(c19.191,33.332) 25.1,33.332 25.1,35.311 cw(c26.139,35.311) 26.139,36.35 U6.5@26.525,36.35 ; -28.251,-26.187 -28.661,-26.596 ccw(c-27.31,-27.948) -29.221,-27.948 -29.221,-30.779 ccw(c-28,-30.779) -28,-32 -0.302,-32 ccw(c-0.302,-29.46) 1.494,-31.256 cw(c2.716,-32.478) 2.716,-30.75 ccw(c2.716,-30.216) 3.25,-30.216 v1(3.25,-29.25) ; v1(8.462,-34.1) 9.495,-33.067 cw(c11.291,-34.863) 11.291,-32.323 40.635,-32.323 ccw(c40.635,-30.458) 42.5,-30.458 42.5,-26.371 ccw(c40.646,-26.371) 40.646,-24.518 37.597,-24.518 ccw(c37.597,-27.058) 35.801,-25.262 v1(34.862,-26.2)
  Bottom Layer w0.15: v1(-36.198,-1.91) v1(-31.138,-10.4) v1(-24.538,-26.2) v1(-17.938,-42) ; v1(1.862,-18.3) 2.506,-18.944 cw(c0.71,-20.74) 3.25,-20.74 v1(3.25,-29.25) 7.844,-33.844 ccw(c8.462,-33.226) v1(8.462,-34.1) ; v1(28.262,-10.4) v1(34.862,-26.2)
COL1: SW1.3 SW1.21 SW1.39 SW1.57 SW1.75 SW1.93 SW1.111 SW1.129 U6.6 | length 260.4
  Top Layer w0.15: v1(-26.523,-1.91) -24.362,-1.91 ccw(c-24.362,0.63) -22.566,-1.166 -21.444,-0.044 cw(c-20.317,-1.171) -20.317,0.423 14.722,0.423 ccw(c14.722,4.14) 18.44,4.105 18.44,21.221 cw(c23.984,21.221) 20.064,25.141 23.652,28.73 ccw(c19.191,33.191) 25.5,33.191 25.5,35.311 cw(c26.139,35.311) 26.139,35.95 U6.6@26.525,35.95 ; v1(15.062,-34.1) 15.709,-33.453 cw(c17.505,-35.249) 17.505,-32.709 40.739,-32.709 ccw(c40.739,-30.478) 42.971,-30.478 42.971,-25.387 ccw(c41.363,-25.387) v1(42.5,-24.25)
  Bottom Layer w0.15: v1(-26.523,-1.91) v1(-24.538,-10.4) v1(-17.938,-26.2) -16.244,-27.894 cw(c-18.04,-29.69) -15.5,-29.69 -15.5,-33.486 ccw(c-12.96,-33.486) -14.756,-35.282 v1(-8.038,-42) -4.532,-45.506 ccw(c-2.736,-43.71) -2.736,-46.25 21.948,-46.25 ccw(c21.948,-43.71) 23.744,-45.506 29.366,-39.884 cw(c30.852,-41.37) 30.852,-39.268 ccw(c30.852,-37.145) 32.354,-38.646 37.005,-33.995 ccw(c35.209,-32.199) 37.749,-32.199 v1(37.749,-26.187) ; v1(8.462,-18.3) v1(15.062,-34.1) ; v1(34.862,-10.4) v1(41.462,-26.2) 41.855,-25.808 ccw(c40.297,-24.25) v1(42.5,-24.25)
COL2: SW1.5 SW1.23 SW1.41 SW1.59 SW1.77 SW1.95 SW1.113 SW1.131 U6.7 | length 222.5
  Top Layer w0.15: v1(-37.738,-34.1) -36.382,-32.744 cw(c-34.585,-34.54) -34.585,-32 -31.5,-32 ccw(c-31.5,-30.174) -29.674,-30.174 -29.674,-26.424 cw(c-28,-26.424) -28,-24.75 -17.54,-24.75 cw(c-17.54,-27.29) -15.744,-25.494 -15.051,-26.187 ; v1(-16.848,-1.91) -14.212,-1.91 ccw(c-14.212,0.63) -12.416,-1.166 cw(c-9.844,-3.353) -9.844,0.023 15.355,0.023 ccw(c15.372,3.59) 18.94,3.59 18.94,21.014 cw(c24.484,21.014) 20.564,24.934 23.935,28.306 ccw(c19.191,33.05) 25.9,33.05 25.9,35.375 cw(c26.075,35.375) 26.075,35.55 U6.7@26.525,35.55 ; v1(1.862,-42) 3.118,-40.744 cw(c4.915,-42.54) 4.915,-40 14.198,-40 ccw(c14.198,-37.46) 15.994,-39.256 ccw(c14.772,-38.034) 16.5,-38.034 v1(16.5,-37) ; v1(16,-15.5) 21.5,-15.5 ccw(c21.5,-14.259) 22.741,-14.259 22.741,-10.27 cw(c24.261,-10.27) 24.261,-8.75 35.767,-8.75 cw(c35.767,-9.583) 36.356,-8.994 37.749,-10.387
  Bottom Layer w0.15: v1(-16.848,-1.91) v1(-17.938,-10.4) v1(-11.338,-26.2) -9.744,-27.794 cw(c-11.54,-29.59) -9,-29.59 -9,-30.086 ccw(c-6.46,-30.086) -8.256,-31.882 v1(1.862,-42) ; v1(16,-15.5) 15.806,-15.694 ccw(c17.602,-17.49) 15.062,-17.49 v1(15.062,-18.3) v1(21.662,-34.1) 18.27,-34.1 ccw(c18.27,-35.551) 17.244,-34.525 ccw(c19.04,-36.321) 16.5,-36.321 v1(16.5,-37)
COL3: SW1.7 SW1.25 SW1.43 SW1.61 SW1.79 SW1.97 SW1.115 SW1.133 U6.8 | length 216.8
  Top Layer w0.15: v1(-7.173,-1.91) 2.338,-1.91 ccw(c2.338,0.63) 4.134,-1.166 4.272,-1.028 cw(c5.844,-2.6) 5.844,-0.377 15.919,-0.377 ccw(c15.919,2.831) 18.188,0.562 ccw(c15.165,3.585) 19.44,3.585 19.44,20.807 cw(c24.984,20.807) 21.064,24.727 25.319,28.982 ccw(c20.535,33.766) 27.3,33.766 U6.8@27.3,34.775
  Bottom Layer w0.15: v1(-31.138,-34.1) v1(-37.738,-18.3) -38.006,-18.032 cw(c-36.21,-16.236) -38.75,-16.236 -38.75,-2.04 cw(c-37.21,-2.04) -37.21,-0.5 -9.635,-0.5 cw(c-9.635,-3.04) -7.839,-1.244 v1(-7.173,-1.91) v1(-11.338,-10.4) v1(-4.738,-26.2) -4.738,-27.92 ccw(c0.107,-27.92) -3.319,-31.346 6.181,-40.846 ccw(c8.968,-38.059) 8.968,-42 v1(11.762,-42) v1(28.262,-34.1) v1(21.662,-18.3)